# Altium PCB zigbee_board.PCBDOC (part 1 of 2)
Units mil, origin at the board's own origin, x right, y up, seen from the top; angles counter-clockwise.
Board outline 1555 x 795 mil, 2 copper layers (TOP, BOTTOM), stack 10.4 mil thick; 37 components, 38 nets, 180 pads, 75 vias.
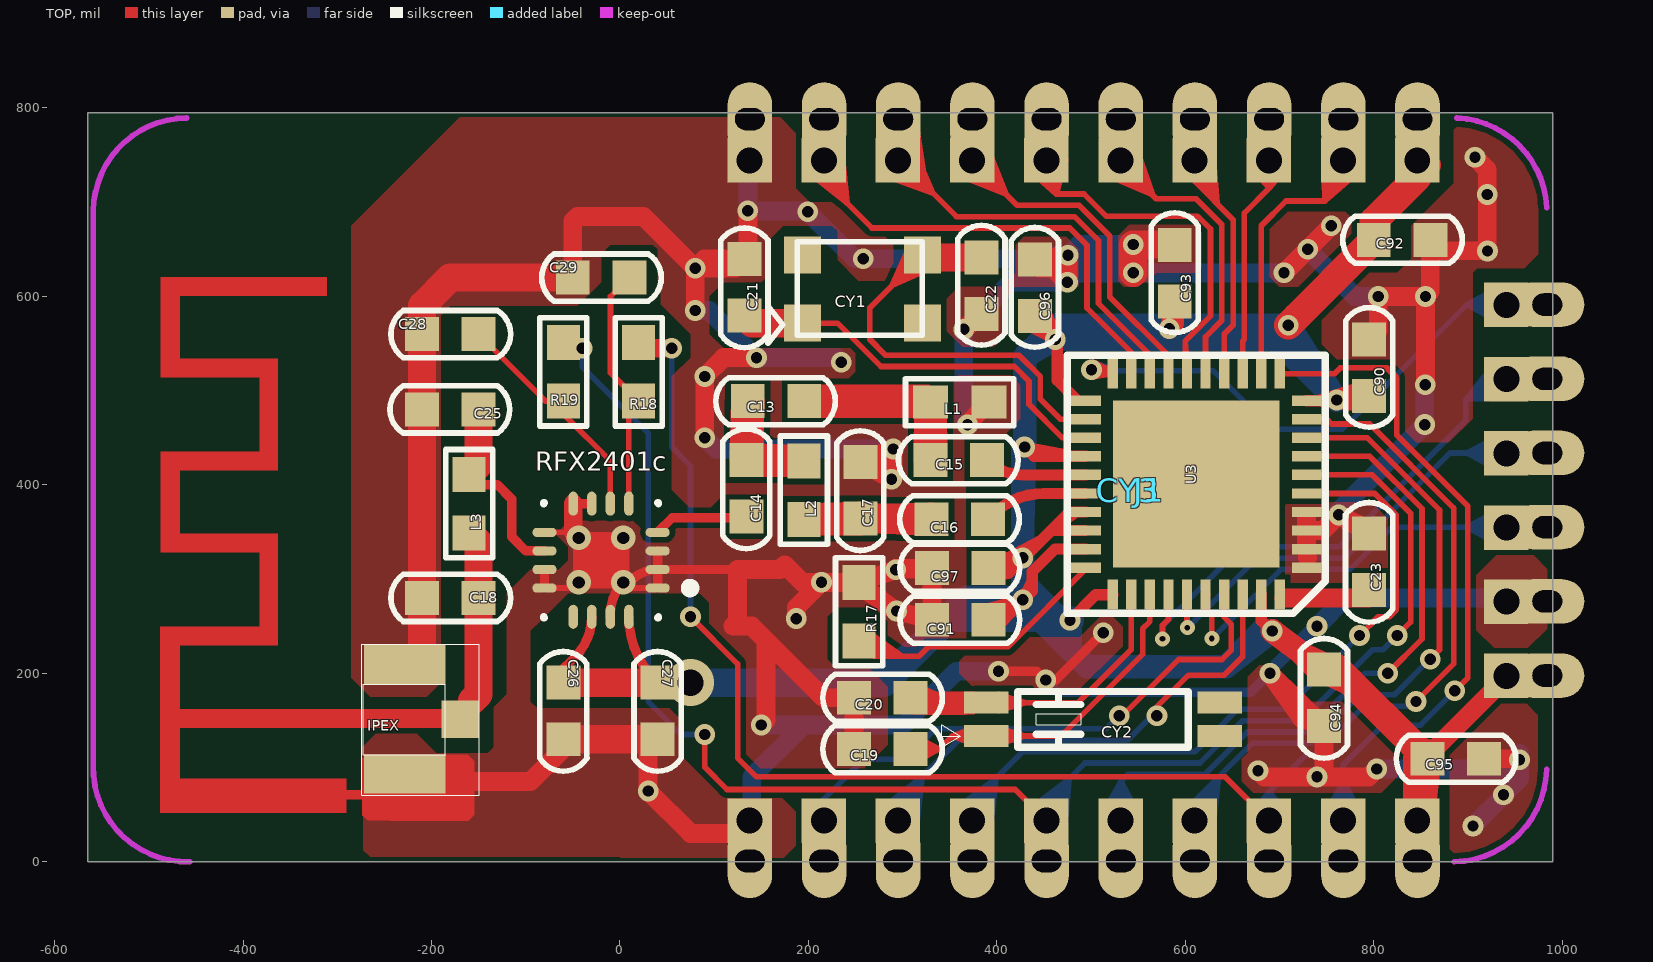
[diagram p0: TOP view]
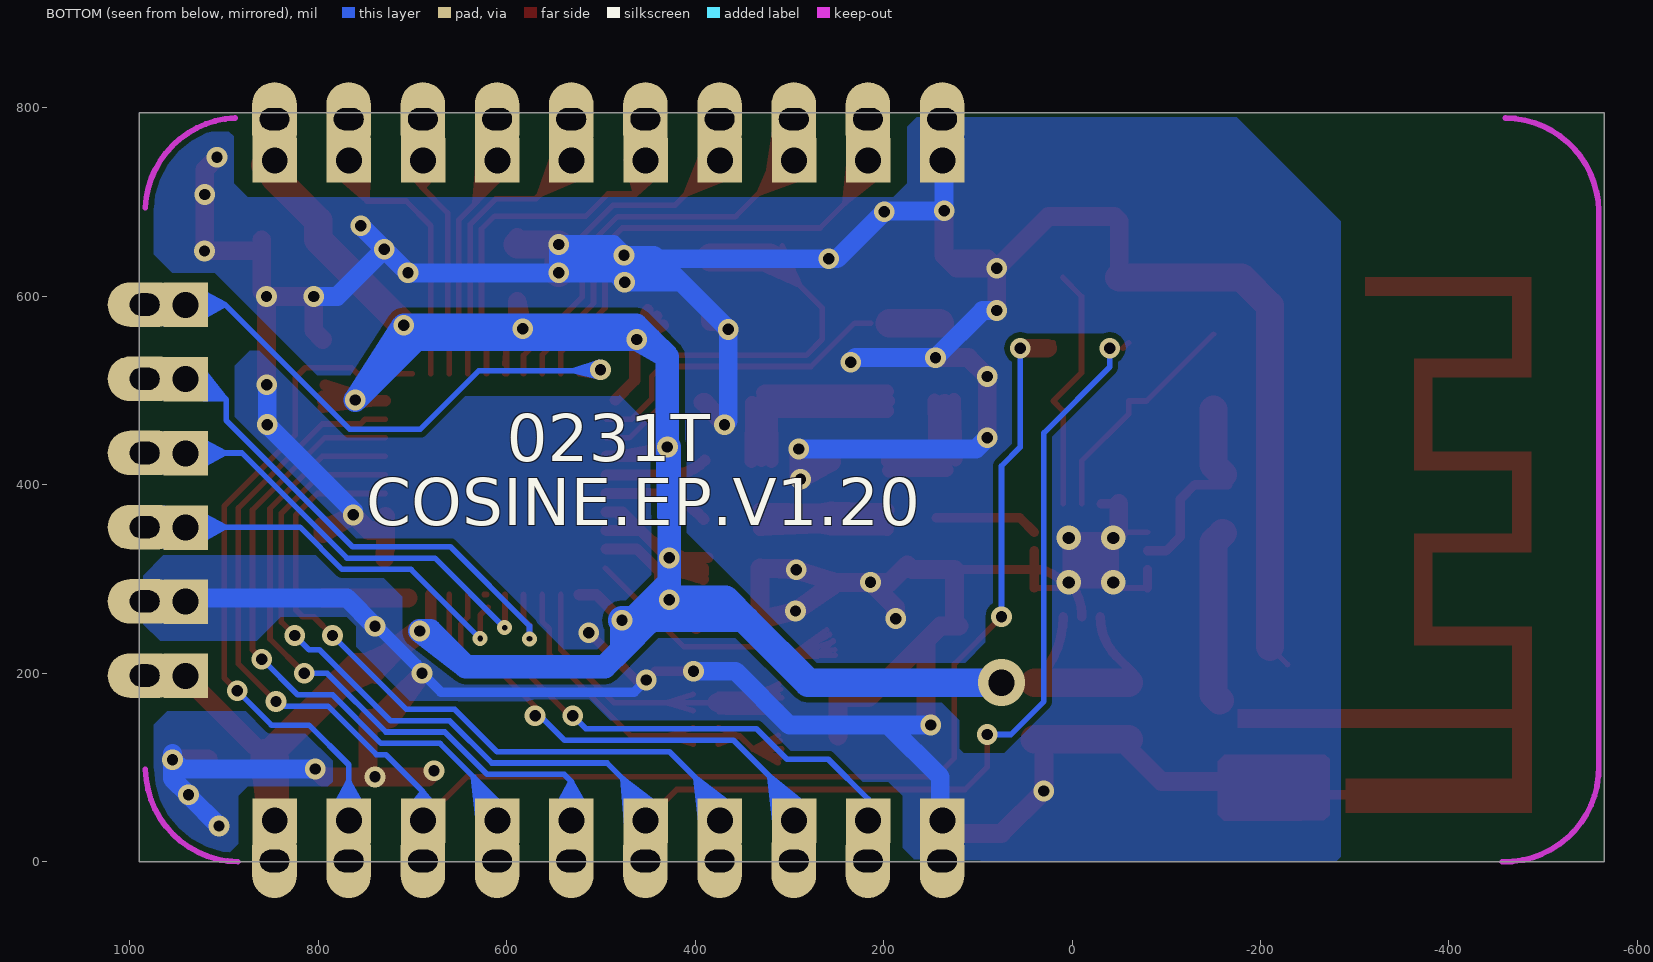
[diagram p1: BOTTOM view, seen from below]

## Layer stack, top to bottom
TOP: signal copper 1.2
Dielectric: dielectric 8, FR-4, Dk 4.5
BOTTOM: signal copper 1.2

## Board outline
-565,795 990,795 990,0 -565,0

## Design rules (kind name [scope] priority, off if disabled: settings)
Clearance "'Default' PADS rule_18" [All] p1: gap=6
Clearance "'Default' PADS rule_15" [IsVia vs IsVia] p2: gap=6
ComponentClearance "'Default' PADS rule_12" [All] p1: gap=6 collisioncheckmode=3 verticalgap=10
FlightTimeFalling "'Class' PADS rule_23" [InNetClass('Class1')] p1: maximum=10.00
FlightTimeFalling "'Default' PADS rule_6" [All] p2: maximum=10.00
FlightTimeRising "'Class' PADS rule_22" [InNetClass('Class1')] p1: maximum=10.00
FlightTimeRising "'Default' PADS rule_5" [All] p2: maximum=10.00
Length "'Class' PADS rule" [InNetClass('Class1')] p1: maxlimit=18503.27 minlimit=0
Length "'Default' PADS rule" [All] p2: maxlimit=50000 minlimit=0
MatchedLengths "'Class' PADS rule_24" [InNetClass('Class1')] p1: tolerance=200 checknetsindiffpair=TRUE checkdiffpairvsdiffpair=TRUE checkothers=TRUE
MatchedLengths "'Default' PADS rule_7" [InNetClass('All Nets')] p2: tolerance=200 checknetsindiffpair=TRUE checkdiffpairvsdiffpair=TRUE checkothers=TRUE
MaxMinImpedance "'Class' PADS rule_21" [InNetClass('Class1')] p1: minimum=50.00 maximum=150.0
MaxMinImpedance "'Default' PADS rule_4" [All] p2: minimum=50.00 maximum=150.0
ParallelSegment "'Class' PADS rule_20" [InNetClass('Class1')] p1: limit=1000 gap=200
ParallelSegment "'Class' PADS rule_19" [InNetClass('Class1')] p2: limit=1000 gap=200
ParallelSegment "'Default' PADS rule_3" [All] p3: limit=1000 gap=200
ParallelSegment "'Default' PADS rule_2" [All] p4: limit=1000 gap=200
PlaneClearance "'Default' PADS rule_14" [All] p1: clearance=6
PlaneConnect "Power Plane Connect Style - from global settings" [All] p1: planeconnectstyle=Relief reliefexpansion=20 reliefentries=2 reliefconductorwidth=10 reliefairgap=10
PolygonConnect [All] p1: connectstyle=Direct reliefconductorwidth=10 reliefentries=4 polygonreliefangle="90 Angle"
RoutingLayers "'Default' PADS rule_10" [All] p1: top layer_v5=TRUE bottom layer_v5=TRUE
RoutingPriority "'Default' PADS rule_9" [All] p1: routingpriority=0
RoutingTopology "'Default' PADS rule_8" [All] p1: topology=Shortest
RoutingVias "'Default' PADS rule_11" [All] p1: holewidth=12 width=22 viastyle="Through Hole" minholewidth=12 minwidth=22 maxholewidth=12 maxwidth=22
SMDToCorner "'Default' PADS rule_16" [All] p1: distance=60000
SMDToPlane "'Default' PADS rule_17" [All] p1: distance=60000
SolderMaskExpansion [All] p1: expansion=4
TestPointUsage [All] p1: valid=0 allowmultiple=FALSE
Testpoint [All] p1: side=15 testpointundercomponent=TRUE minsize=40 maxsize=100 preferedsize=60 minholesize=0 maxholesize=40 preferedholesize=32 testpointgrid=1 style=1023 order=0-112345678
Width "'Net' PADS rule_29" [InNet('NETC16_1')] p1: maxlimit=100 minlimit=6 preferedwidth=15
Width "'Net' PADS rule_28" [InNet('NETC13_1')] p2: maxlimit=100 minlimit=6 preferedwidth=15
Width "'Net' PADS rule_27" [InNet('GND')] p3: maxlimit=100 minlimit=6 preferedwidth=20
Width "'Net' PADS rule_26" [InNet('NETC13_2')] p4: maxlimit=100 minlimit=6 preferedwidth=15
Width "'Net' PADS rule_25" [InNet('NETC14_1')] p5: maxlimit=100 minlimit=6 preferedwidth=15
Width "'Net' PADS rule" [InNet('P02')] p6: maxlimit=100 minlimit=6 preferedwidth=12
Width "'Default' PADS rule_13" [All] p7: maxlimit=100 minlimit=6 preferedwidth=6
13 further rules are at their usual default settings.

## Components (designator, comment, footprint, x,y, rotation, side; value= is the part's Value field where it differs from the comment)
C13 "0603C" 0603C 165.7,488.79 r0 top
C14 "0603C" 0603C 134.21,396.19 r90 top
C15 "0603C" 0603C 359.7,426.21 r0 top
C16 "0603C" 0603C 360.93,363.47 r0 top
C17 "0603C" 0603C 255.22,394.34 r90 top
C18 "0603C" 0603C -180,280 r180 top
C19 "0603C" 0603C 278.35,119.55 r180 top
C20 "0603C" 0603C 278.35,174.02 r180 top
C21 "0603C" 0603C 132.2,609.61 r90 top
C22 "0603C" 0603C 383.77,611.37 r270 top
C23 "0603C" 0603C 795.17,318.16 r90 top
C25 "0603C" 0603C -180,480 r0 top
C26 "0603C" 0603C -60,160 r90 top
C27 "0603C" 0603C 40,160 r90 top
C28 "0603C" 0603C -180,560 r180 top
C29 "0603C" 0603C -20,620 r180 top
C90 "0603C" 0603C 795.34,524.14 r270 top
C91 "0603C" 0603C 361.37,256.83 r0 top
C92 "0603C" 0603C 830.21,660.1 r180 top
C93 "0603C" 0603C 588.95,624.71 r270 top
C94 "0603C" 0603C 747.36,173.8 r90 top
C95 "0603C" 0603C 887.07,109.26 r180 top
C96 "0603C" 0603C 440.53,609.15 r270 top
C97 "0603C" 0603C 361.37,311.83 r0 top
CY1 "CRY-3225" CRY-3225 181.62,551.81 r0 top
CY2 "XTAL1" XTAL1 388.86,133.41 r0 top
CY3 "COM25_DIP" COM25_DIP -0.1,0.35 r0 top
IPEX "ANT_DIP" ANT_DIP -211.66,150.72 r0 top
J1 "COM25X20" COM25X20 0.16,0.73 r0 top
L1 "0603" 0603 360.69,487.71 r180 top
L2 "0603" 0603 195.33,394.34 r90 top
L3 "0603" 0603 -160,380 r90 top
R17 "0603" 0603 253.85,265.29 r270 top
R18 "0603" 0603 20,520 r270 top
R19 "0603" 0603 -60,520 r270 top
RFX2401c "Comment" QFN50P300X300X60-16N -20,320 r180 top
U3 "CC2530" CC2530 611.79,400.69 r90 top

## Footprints (in the part's own frame and the unit in brackets; to place one, negate y for a bottom-side part, rotate by r counter-clockwise, add the part's x,y. Pads: shape width x height; smd on the part's side, far side on the other; paste and mask are expansions set on the pad)
0603 [mil]
  rect 37x35 smd: 1(-31,0) 2(31,0)
  silkscreen extent -58,-25 58,25
0603C [mil]
  rect 36x36 smd: 1(-30,0) 2(30,0)
  silkscreen extent -64,-25 63,25
ANT_DIP [mil]
  rect 39.4x39.4 smd: 1(42.2,0.4)
  rect 86.6x41.3 smd: 2(-16.9,58.6) 3(-16.9,-57.5)
  silkscreen extent -62,-80 62,80
CC2530 [mm]
  rect 0.28x0.8 smd: 1(-2.25,-2.975) 2(-1.75,-2.975) 3(-1.25,-2.975) 4(-0.75,-2.975) 5(-0.25,-2.975) 6(0.25,-2.975) 7(0.75,-2.975) 8(1.25,-2.975) 9(1.75,-2.975) 10(2.25,-2.975) 21(2.25,2.975) 22(1.75,2.975) 23(1.25,2.975) 24(0.75,2.975) 25(0.25,2.975) 26(-0.25,2.975) 27(-0.75,2.975) 28(-1.25,2.975) 29(-1.75,2.975) 30(-2.25,2.975)
  rect 0.8x0.28 smd: 11(2.975,-2.25) 12(2.975,-1.75) 13(2.975,-1.25) 14(2.975,-0.75) 15(2.975,-0.25) 16(2.975,0.25) 17(2.975,0.75) 18(2.975,1.25) 19(2.975,1.75) 20(2.975,2.25) 31(-2.975,2.25) 32(-2.975,1.75) 33(-2.975,1.25) 34(-2.975,0.75) 35(-2.975,0.25) 36(-2.975,-0.25) 37(-2.975,-0.75) 38(-2.975,-1.25) 39(-2.975,-1.75) 40(-2.975,-2.25)
  rect 4.5x4.5 smd: 41(0,0)
  silkscreen extent -3.48,-3.48 3.48,3.48
COM25_DIP [mm]
  rect 1.2x1.2 hole 0.7: 0(3.5,1.1) 1(5.5,1.1) 2(7.5,1.1) 3(9.5,1.1) 4(11.5,1.1) 5(13.5,1.1) 6(15.5,1.1) 7(17.5,1.1) 8(19.5,1.1) 9(21.5,1.1) 10(23.9,5) 11(23.9,7) 12(23.9,9) 13(23.9,11) 14(23.9,13) 15(23.9,15) 16(21.5,18.9) 17(19.5,18.9) 18(17.5,18.9) 19(15.5,18.9) 20(13.5,18.9) 21(11.5,18.9) 22(9.5,18.9) 23(7.5,18.9) 24(5.5,18.9) 25(3.5,18.9)
COM25X20 [mm]
  oval 1.2x2 hole 0.6 slot 0.8 at 0 deg: 0(3.5,0) 1(5.5,0) 2(7.5,0) 3(9.5,0) 4(11.5,0) 5(13.5,0) 6(15.5,0) 7(17.5,0) 8(19.5,0) 9(21.5,0) 16(21.5,20) 17(19.5,20) 18(17.5,20) 19(15.5,20) 20(13.5,20) 21(11.5,20) 22(9.5,20) 23(7.5,20) 24(5.5,20) 25(3.5,20)
  oval 2x1.2 hole 0.6 slot 0.8 at 0 deg: 10(25,5) 11(25,7) 12(25,9) 13(25,11) 14(25,13) 15(25,15)
CRY-3225 [mm]
  rect 1x1 smd: 1(0.308,0.504) 2(3.549,2.341) 3(3.549,0.504) 4(0.308,2.341)
  silkscreen extent -0.62,-0.04 3.54,2.7
QFN50P300X300X60-16N [mm] "QFN, 16-Leads, Body 3.1x3.1mm (max), Pitch 0.50mm, IPC Medium Density"
  oval 0.65x0.25 smd: 1(-1.525,0.75) 2(-1.525,0.25) 3(-1.525,-0.25) 4(-1.525,-0.75) 9(1.525,-0.75) 10(1.525,-0.25) 11(1.525,0.25) 12(1.525,0.75)
  oval 0.25x0.65 smd: 5(-0.75,-1.525) 6(-0.25,-1.525) 7(0.25,-1.525) 8(0.75,-1.525) 13(0.75,1.525) 14(0.25,1.525) 15(-0.25,1.525) 16(-0.75,1.525)
  silkscreen extent -2.53,-1.55 1.55,1.55, body extent -1.55,-1.55 1.55,1.55, height 0.6
XTAL1 [mm]
  rect 1.2x0.6 smd: 1(0,0) 2(0,0.9) 3(6.3,0) 4(6.3,0.9)
  silkscreen extent -1.2,-0.3 5.45,1.2

## Via types
v1: diameter 22, hole 12, TOP to BOTTOM, 67 vias
v2: diameter 25.98, hole 12.99, TOP to BOTTOM, tented top, 4 vias
v3: diameter 16, hole 6, TOP to BOTTOM, 3 vias
v4: diameter 50, hole 28, TOP to BOTTOM, 1 vias

## Nets (pads, with @x,y where several pads share a name; then routed paths per layer and width w, separated by ;. In a path a pad name is that pad's centre, name@x,y a point inside that pad or via, vN(x,y) a via of type N, cw(c..) or ccw(c..) an arc to the next point about the centre after c; other vN are vias at no path point)
C18_1: C18.1 IPEX.1 L3.1 | length 184.9
  TOP w30: L3.1@-160,349 -150,339 -150,177.76 -156.75,171.01
C25_1: C25.2 L3.2 RFX2401c.10 | length 210.6
  TOP w10: L3.2@-165,400 -130,400 -115,385 -115,345 -99.84,329.84 RFX2401c.10@-80.04,329.84
  TOP w30: L3.2@-160,411 -150,421 C25.2@-150,480
GND: C17.2 C18.2 C19.2 C20.2 C21.2 C22.2 C23.2 C25.1 C26.1 C27.1 C28.2 C29.2 C90.1 C91.1 C92.1 C93.1 C94.1 C95.1 C96.1 C97.1 CY3.0 CY3.11 CY3.25 IPEX.2 IPEX.3 J1.0 J1.11 J1.25 L1.1 R17.1 RFX2401c.1 RFX2401c.2 RFX2401c.3 RFX2401c.7 RFX2401c.8 RFX2401c.9 RFX2401c.11 RFX2401c.12 RFX2401c.15 U3.1 U3.2 U3.3 U3.4 | length 7842.7
  TOP w6: IPEX.2@-228.56,209.32 IPEX.2@-210,227.88 ; RFX2401c.12@-80.04,290.47 v2@-49.53,290.47 ; RFX2401c.9@-80.04,349.53 v2@-49.53,349.53 ; v2@3.62,290.47 RFX2401c.1@40.04,290.47
  TOP w10: RFX2401c.12@-80.04,290.47 RFX2401c.11@-80.04,310.16 ; RFX2401c.8@-49.53,380.04 RFX2401c.7@-31.08,380.04 ; RFX2401c.15@-10.16,259.96 -10.16,263.11 cw(c36.89,263.11) v2(3.62,296.38) ; v2@6.57,293.43 11.48,298.33 cw(c40.04,269.76) RFX2401c.2@40.04,310.16 ; RFX2401c.1@40.04,290.47 RFX2401c.2@40.04,310.16 ; RFX2401c.3@40.04,329.84 RFX2401c.2@40.04,310.16 ; 124.84,310.16 RFX2401c.2@40.04,310.16 ; v1(401.82,202.21) 442.55,202.21 v1(451.96,192.8) 462.66,192.8 v1(512.94,243.08)
  TOP w20: IPEX.3@-210,85 -95,85 C26.1@-50,130 ; C29.2@-50,620 -50,680 -45,685 25,685 v1(80,630) ; v2@-49.53,349.53 RFX2401c.8@-49.53,380.04 ; C27.1@30,130 v1(30,75) 75,30 CY3.0@135,30 ; v1(80,585) v1(80,630) ; v1(90,450) v1(90,515) 110,535 v1(145,535) ; v1(135.84,690.8) 135.84,643.25 C21.2@132.2,639.61 ; v1(150,145) 155,150 155,235 ; v1(187.34,258.01) 187.34,269.82 v1(213.98,296.46) ; C19.2@248.35,133.35 C20.2@248.35,174.02 215.98,174.02 155,235 ; R17.1@253.85,292.85 v1(293.51,266.07) ; R17.1@253.85,296.29 v1(213.98,296.46) ; R17.1@253.85,297.29 v1(292.76,309.74) ; 273.78,431.67 278.42,431.67 ; v1@292.76,311.48 C97.1@331.37,311.83 ; C97.1@331.37,311.48 v1(292.76,309.74) ; L1.1@390.69,487.71 v1(368.93,463.89) 389.74,487.71 L1.1@391.69,487.71 ; C96.1@445,630 460,630 v1(475,615) ; v1@475.66,615.66 v1(475.66,643.63) ; C93.1@588.95,654.71 C93.1@588.95,662.71 ; v1(677.33,96.57) 683.91,90 v1(740,90) ; v1(705,625) v1(730,650) v1(755,675) ; U3.4@728.91,366.66 U3.3@728.91,351.48 ; 730,322.24 U3.2@728.91,331.79 U3.3@728.91,351.48 ; C90.1@795.34,554.14 805,563.81 v1(805,600) v1(855,600) ; v1(803.31,98.47) 794.84,90 v1(740,90) ; v1(854.94,506.26) 855,506.32 v1(855,600) ; C92.1@860.21,660.1 C92.1@860.21,645 ; v1(907.64,747.59) 920.65,734.58 v1(920.65,708.17) v1@920.65,648.55 ; C95.1@917.07,109.26 v1@953.92,109.26 ; v1(920.9,648.3) v1@920.65,648.55 ; v1(80,630) 89.61,639.61 C21.2@132.2,639.61 ; v1(80,630) 122.59,630 C21.2@132.2,639.61 ; 155,235 140,250 120,250 125,255 125,310 170,310 175,315 193.54,296.46 v1(213.98,296.46) ; v1(292.76,309.74) C97.1@331.37,311.83 ; v1(293.51,266.07) 253.85,295.29 v1(293.51,266.07) ; v1(293.51,266.07) C91.1@331.37,256.83 C97.1@331.37,311.83 ; v1(475.66,643.63) 471.18,639.15 C96.1@440.53,639.15 v1(475.66,643.63) ; 723.57,151.8 747.36,151.8 747.36,97.36 v1(740,90) ; 723.57,151.8 v1(690,200) C94.1@747.36,143.8 ; 723.57,151.8 C94.1@747.36,143.8 ; 723.57,151.8 C94.1@747.36,143.8 ; U3.3@728.91,351.48 746.26,351.48 v1(762.88,368.1) ; v1(762.88,368.1) 787.17,356.16 795.17,356.16 C23.2@795.17,348.16 v1(762.88,368.1) ; v1(855,600) 860.21,605.21 C92.1@860.21,645 ; C92.1@860.21,645 863.76,648.55 v1@920.65,648.55 ; C17.2@255.22,424.34 v1(288.2,405.91) 290.09,407.8 v1(290.09,438.11) C17.2@255.22,424.34 ; v1(365,565) 375.77,573.37 383.77,573.37 C22.2@383.77,581.37 v1(365,565)
  TOP w30: IPEX.2@-210,227.88 -210,590 -180,620 C29.2@-50,620 ; C26.1@-60,130 -50,130 30,130 C27.1@40,130 ; v1(545,625) v1(545,655) C93.1@588.66,655
  BOTTOM w10: v1(451.96,192.8) 464.76,180 670,180 v1(740,250) ; 695,210 v1@735,250
  BOTTOM w20: v1(80,585) 95,585 v1(145,535) 230,535 v1(235,530) ; v1(90,450) 101.89,438.11 v1(290.09,438.11) ; CY3.25@135.84,742.59 v1(135.84,690.8) v1@198.55,690.8 ; CY3.0@140,35 140,43.66 140,90 195,145 ; v1(150,145) 195,145 ; v1(199.42,689.93) 249.39,639.96 v1(258.2,639.96) 439.96,639.96 ; v1(368.93,463.89) 365,467.82 v1(365,565) 415,615 ; v1(401.82,202.21) 357.21,202.21 300,145 195,145 ; v1(740,250) 770,280 940.84,280 CY3.11@955,280 ; v1(755,675) v1(730,650) ; v1(762.88,368.1) 762.88,372.46 v1(854.35,463.93) 854.35,505.67 v1(854.94,506.26) ; v1(803.31,98.47) 945.23,98.47 v1@954.97,108.21 ; v1(805,600) 780,600 v1(730,650) ; v1(905.45,37.82) 937.89,70.26 v1(937.89,71.08) 955,88.19 955,108.25 v1@955,115 ; 415,615 432.06,632.06 ; 415,615 v1(475,615) v1@475.66,615.66 ; 432.06,632.06 439.96,639.96 ; 432.06,632.06 475,632.06 475.66,632.06 ; 439.96,639.96 443.63,643.63 v1(475.66,643.63) ; 439.96,639.96 471.99,639.96 v1(475.66,643.63) ; v1@475.66,615.66 475.66,632.06 ; v1@475.66,615.66 485,625 v1(545,625) ; 475.66,632.06 v1(475.66,643.63) ; 475.66,632.06 537.94,632.06 v1(545,625) ; v1(475.66,643.63) 487.03,655 v1(545,655) ; v1(475.66,643.63) 533.63,643.63 v1(545,655) ; v1(545,625) v1(705,625) v1(730,650) ; v1(545,625) v1(545,655)
  other v1: 954.93,108.25
  other v2: -43.62,296.38 -43.62,343.62 3.62,343.62
NETC13_1: C13.1 C14.2 L2.2 | length 1487.2
  TOP w15: C13.1@125.22,488.16 C14.2@134.21,426.19 ; C13.1@125.26,489.92 C14.2@123.75,427.07 ; C13.1@125.47,486.41 C14.2@144.68,427.07 ; C14.2@133.25,415.73 L2.2@194.38,415.38 ; C14.2@133.54,436.67 L2.2@194.65,435.31 ; C14.2@134.97,415.72 L2.2@195.33,425.34 ; C14.2@135.12,415.73 L2.2@195.33,426.19 ; C14.2@135.12,436.65 L2.2@195.33,426.19 ; C14.2@135.26,436.64 L2.2@195.33,425.34 ; C14.2@136.67,415.98 L2.2@194.65,435.31 ; C14.2@136.95,436.33 L2.2@194.38,415.38 ; C13.1@145.81,485.94 C14.2@123.75,427.07 ; C13.1@146.14,487.67 C14.2@134.21,426.19 ; C13.1@146.18,489.42 C14.2@144.68,427.07 ; C14.2@123.75,427.07 C13.1@134.21,488.79 ; C14.2@123.75,427.07 C13.1@135.7,488.79 ; C14.2@134.21,426.19 L2.2@195.33,426.19 ; C14.2@134.21,426.19 C13.1@134.21,488.79 ; C14.2@134.21,426.19 L2.2@194.38,415.38 ; C14.2@134.21,426.19 L2.2@194.65,435.31 ; C14.2@134.21,426.19 L2.2@195.33,425.34 ; C14.2@134.21,426.19 C13.1@135.7,488.79 ; C13.1@134.21,488.79 C13.1@135.7,488.79 ; C13.1@134.21,488.79 C14.2@144.68,427.07 ; C13.1@135.7,488.79 C14.2@144.68,427.07 ; L2.2@195.33,425.34 L2.2@195.33,426.19
NETC13_2: C13.2 C15.1 L1.2 | length 1259.1
  TOP w15: C13.2@195.7,488.79 313.56,488.79 L1.2@321.51,496.75 ; C15.1@319.23,425.4 L1.2@319.72,486.9 ; C15.1@319.24,427.11 L1.2@329.69,487.71 ; C15.1@319.52,428.79 L1.2@339.66,486.9 ; L1.2@326.5,499.26 196.57,499.26 258.7,488.79 196.57,478.33 327.54,478.33 L1.2@328.18,478.98 ; L1.2@327.72,477.76 266.17,488.79 ; L1.2@328.06,497.7 266.17,488.79 ; L1.2@328.69,487.71 266.17,488.79 ; L1.2@329.69,488.79 L1.2@329.69,487.71 ; C15.1@339.88,428.8 L1.2@319.72,486.9 ; C15.1@340.17,425.4 L1.2@339.66,486.9 ; C15.1@340.16,427.11 L1.2@329.69,487.71 ; L1.2@319.72,486.9 C15.1@329.7,426.21 ; C15.1@329.7,426.21 L1.2@329.69,487.71 ; C15.1@329.7,426.21 L1.2@339.66,486.9
NETC14_1: C14.1 RFX2401c.4 | length 110.6
  TOP w10: RFX2401c.4@40.04,349.53 55.51,365 C14.1@144.21,365
NETC15_2: C15.2 U3.25 | length 150.7
  TOP w12: C15.2@389.7,426.21 389.92,425.99 ccw(c427.24,463.3) 427.24,410.53 U3.25@494.66,410.53 ; 442.91,410.53 U3.25@484.43,410.53
NETC16_1: C16.1 C17.1 L2.1 | length 1680.9
  TOP w15: C17.1@252.4,374.45 L2.1@196.33,353.39 ; C17.1@252.74,354.13 L2.1@196,373.31 ; C17.1@254.12,374.78 L2.1@195.33,363.34 ; C17.1@254.3,353.88 L2.1@195.33,364.34 ; C17.1@254.3,374.8 L2.1@195.33,364.34 ; C17.1@254.47,353.86 L2.1@195.33,363.34 ; C17.1@255.87,374.82 L2.1@196,373.31 ; C17.1@255.95,353.86 C16.1@318.23,363.47 ; C17.1@256.22,353.89 L2.1@196.33,353.39 ; C17.1@256.23,374.79 C16.1@318.23,363.47 ; C16.1@328.56,353.24 C17.1@268.1,372.62 ; C16.1@328.79,373.75 C17.1@268.04,355.73 ; C16.1@329.94,353.02 C17.1@267.93,364.16 ; C16.1@330.05,353.01 267.93,363.47 C16.1@330.05,373.94 ; C16.1@330.17,373.94 C17.1@267.93,364.16 ; C16.1@331.34,352.98 C17.1@268.04,355.73 ; C16.1@331.58,373.95 C17.1@268.1,372.62 ; L2.1@195.33,363.34 L2.1@195.33,364.34 ; L2.1@195.33,363.34 C17.1@255.22,364.34 ; L2.1@195.33,364.34 C17.1@255.22,364.34 ; L2.1@196,373.31 C17.1@255.22,364.34 ; L2.1@196.33,353.39 C17.1@255.22,364.34 ; C17.1@255.22,364.34 255.22,363.47 C16.1@330.93,363.47 ; C17.1@255.22,364.34 C16.1@318.23,363.47 ; C17.1@267.93,364.16 C16.1@330.93,363.47 ; C17.1@268.04,355.73 C16.1@330.93,363.47 ; C17.1@268.1,372.62 C16.1@330.93,363.47
NETC16_2: C16.2 U3.26 | length 146.4
  TOP w12: C16.2@390.93,363.47 396.04,368.59 cw(c449.78,314.85) 449.78,390.85 ; U3.26@484.43,390.85 449.78,390.85 ; U3.26@494.66,390.85 449.78,390.85
NETC19_1: C19.1 CY2.1 U3.33 | length 657.6
  TOP w6: C19.1@308.35,119.55 338.87,119.55 ; C19.1@309.67,110.65 338.87,119.55 ; C19.1@309.67,128.46 338.87,119.55 ; C19.1@312.03,105.01 338.87,119.55 ; C19.1@312.03,134.09 338.87,119.55 ; CY2.1@375.46,124.74 352.72,133.41 ; CY2.1@375.46,142.07 352.72,133.41 ; CY2.1@377.05,133.41 352.72,133.41 ; CY2.1@400.67,133.41 430.49,133.41 ; CY2.1@401.98,124.69 430.49,133.41 ; CY2.1@401.98,142.12 430.49,133.41 ; U3.33@562.58,273.33 562.58,255.09 ; U3.33@562.58,283.56 562.58,255.09 ; 338.87,119.55 352.72,133.41 ; 352.72,133.41 468.13,133.41 554.8,220.08 554.8,247.31 562.58,255.09
NETC20_1: C20.1 CY2.2 U3.32 | length 936.4
  TOP w6: C20.1@308.35,174.02 C20.1@320,174.02 ; C20.1@309.51,182.94 343.2,174.02 ; C20.1@311.57,188.67 343.2,174.02 ; C20.1@311.87,177.55 C20.1@323.53,177.55 ; C20.1@320.92,168.12 C20.1@321.3,168.12 ; C20.1@321.22,168.2 C20.1@321.3,168.12 ; 326.36,163.05 C20.1@324.32,165.1 ; 337.3,168.12 C20.1@321.3,168.12 ; CY2.2@374.94,159.37 311.57,159.37 343.2,174.02 ; CY2.2@375.7,160.13 348.38,168.84 ; CY2.2@400.67,168.84 430.49,168.84 ; CY2.2@401.98,160.13 430.49,168.84 ; CY2.2@401.98,177.56 430.49,168.84 ; U3.32@542.89,273.33 542.89,253.81 ; U3.32@542.89,283.56 542.89,253.81 ; C20.1@320,174.02 325.18,168.84 348.38,168.84 ; C20.1@320,174.02 343.2,174.02 ; C20.1@320,174.02 C20.1@323.53,177.55 ; C20.1@321.3,168.12 C20.1@324.32,165.1 ; C20.1@323.53,177.55 375.7,177.55 348.38,168.84 ; C20.1@324.32,165.1 309.51,165.1 343.2,174.02 ; C20.1@324.32,165.1 361.25,165.1 365,168.84 ; 343.2,174.02 348.38,168.84 ; 348.38,168.84 365,168.84 ; 365,168.84 486.59,168.84 542.8,225.05 542.8,253.72 542.89,253.81
  TOP w15: 326.36,163.05 CY2.2@366.56,163.05
  TOP w20: 348.38,168.84 CY2.2@377.05,168.84
NETC21_1: C21.1 CY1.1 U3.23 | length 433.1
  TOP w6: C21.1@132.2,571.64 C21.1@132.2,579.61 C21.1@140.17,571.64 ; 213.68,571.66 231.04,571.66 277.14,525.57 418.71,525.57 434.27,510 434.27,485.55 469.91,449.9 ; U3.23@484.43,449.9 469.91,449.9 ; U3.23@494.66,449.9 469.91,449.9
  TOP w30: C21.1@140.17,571.64 CY1.1@193.76,571.64
NETC22_1: C22.1 CY1.2 U3.22 | length 748.5
  TOP w6: CY1.2@307.61,653.44 288.94,611.57 ; CY1.2@312.97,650.61 288.94,611.57 ; CY1.2@317.88,647.12 288.94,611.57 ; CY1.2@321.36,641.37 CY1.2@321.36,643.98 265.17,587.79 265.17,554.51 282.11,537.57 423.68,537.57 446.27,514.98 446.27,490.88 467.56,469.59 ; CY1.2@324.5,640.51 288.94,611.57 ; CY1.2@327.98,635.6 288.94,611.57 ; CY1.2@330.81,630.23 288.94,611.57 ; U3.22@484.43,469.59 467.56,469.59 ; U3.22@494.66,469.59 467.56,469.59
  TOP w30: CY1.2@321.36,641.37 C22.1@383.77,641.37
NETC23_1: C23.1 U3.40 | length 90.3
  TOP w20: U3.40@704.73,280 C23.1@795,280
NETR17_2: R17.2 U3.30 | length 529.7
  TOP w6: R17.2@251.4,219 299.94,218.04 ; R17.2@251.89,225.02 299.94,218.04 ; R17.2@253.85,233.29 299.94,218.04 ; R17.2@253.85,234.29 270.1,218.04 317.32,218.04 327.29,228.01 411.99,228.01 U3.30@495.38,311.39 ; R17.2@257.21,241.09 299.94,218.04 ; R17.2@260.41,246.22 299.94,218.04
P00: CY3.24 J1.24 U3.19 | length 1682.5
  TOP w6: CY3.24@196.49,749.68 J1.24@216.69,786.07 ; CY3.24@196.71,767.28 CY3.24@216.69,730.76 ; CY3.24@197.34,752.23 J1.24@216.69,772.38 ; CY3.24@200.65,731.17 241.27,698.9 ; CY3.24@202.05,747.1 J1.24@216.69,786.07 ; J1.24@202.3,769.82 CY3.24@216.69,730.76 ; CY3.24@202.36,748.4 J1.24@216.69,772.38 ; CY3.24@204.71,735.7 241.27,698.9 ; CY3.24@207.86,745.39 J1.24@216.69,786.07 ; CY3.24@207.93,745.85 J1.24@216.69,772.38 ; J1.24@208.12,771.49 CY3.24@216.69,730.76 ; CY3.24@209.23,739.7 241.27,698.9 ; J1.24@216.69,788.13 216.69,744.44 216.69,723.48 267.49,672.68 477.52,672.68 495.84,654.36 495.84,587.68 542.89,540.63 ; CY3.24@224.32,747.93 241.27,698.9 ; CY3.24@224.96,745.69 J1.24@216.69,772.38 ; CY3.24@225.01,745.28 J1.24@216.69,786.07 ; J1.24@225.27,771.49 CY3.24@216.69,730.76 ; CY3.24@230.13,749.57 241.27,698.9 ; CY3.24@230.58,748.14 J1.24@216.69,772.38 ; CY3.24@230.84,746.92 J1.24@216.69,786.07 ; J1.24@231.09,769.82 CY3.24@216.69,730.76 ; CY3.24@235.67,751.87 J1.24@216.69,772.38 ; CY3.24@236.14,750.52 241.27,698.9 ; CY3.24@236.44,749.43 J1.24@216.69,786.07 ; CY3.24@236.67,767.28 CY3.24@216.69,730.76 ; U3.19@542.89,517.82 542.89,540.63 ; U3.19@542.89,528.05 542.89,540.63 ; CY3.24@216.43,744.44 J1.24@216.69,786.07 ; CY3.24@216.43,744.44 J1.24@216.69,772.38 ; CY3.24@216.43,744.44 241.27,698.9 ; CY3.24@216.69,730.76 J1.24@216.69,772.38
P01: CY3.23 J1.23 U3.18 | length 4483.9
  TOP w6: CY3.23@275.23,749.68 J1.23@295.43,786.07 ; CY3.23@276.08,752.23 J1.23@295.43,772.38 ; CY3.23@277.88,755.67 J1.23@303.31,775.9 ; CY3.23@279.07,759.84 324.87,717.04 ; CY3.23@279.21,757.5 J1.23@309.06,777.7 ; CY3.23@280.56,759 J1.23@314.99,778.94 ; CY3.23@280.79,747.1 J1.23@295.43,786.07 ; CY3.23@281.1,748.4 J1.23@295.43,772.38 ; CY3.23@282.2,751.19 J1.23@303.31,775.9 ; CY3.23@283.1,752.7 J1.23@309.06,777.7 ; CY3.23@283.41,764.06 324.87,717.04 ; CY3.23@284.05,753.93 J1.23@314.99,778.94 ; CY3.23@284.41,726.85 332.24,709.67 ; CY3.23@286.6,745.39 J1.23@295.43,786.07 ; CY3.23@286.67,745.85 J1.23@295.43,772.38 ; CY3.23@286.81,732.45 332.24,709.67 ; CY3.23@287.19,747.69 J1.23@303.31,775.9 ; CY3.23@287.67,748.69 J1.23@309.06,777.7 ; CY3.23@288.12,767.82 324.87,717.04 ; CY3.23@288.2,749.52 J1.23@314.99,778.94 ; CY3.23@289.83,737.68 332.24,709.67 ; J1.23@295.43,788.13 295.43,746.48 296.32,745.59 357.22,684.69 482.49,684.69 507.97,659.21 507.97,592.6 562.58,537.99 ; CY3.23@301.58,750.21 332.24,709.67 ; CY3.23@303.07,740.98 J1.23@314.99,778.94 ; CY3.23@303.47,742.1 J1.23@309.06,777.7 ; CY3.23@303.7,745.69 J1.23@295.43,772.38 ; CY3.23@303.73,743.41 J1.23@303.31,775.9 ; CY3.23@303.75,745.28 J1.23@295.43,786.07 ; CY3.23@306.61,753.56 332.24,709.67 ; CY3.23@308.97,739.62 J1.23@314.99,778.94 ; CY3.23@309.32,748.14 J1.23@295.43,772.38 ; CY3.23@309.53,741.66 J1.23@309.06,777.7 ; CY3.23@309.58,746.92 J1.23@295.43,786.07 ; CY3.23@309.79,744.06 J1.23@303.31,775.9 ; CY3.23@312.04,756.31 332.24,709.67 ; CY3.23@314.41,751.87 J1.23@295.43,772.38 ; CY3.23@315.11,739.16 J1.23@314.99,778.94 ; CY3.23@315.18,749.43 J1.23@295.43,786.07 ; CY3.23@315.68,742.28 J1.23@309.06,777.7 ; CY3.23@315.74,745.88 J1.23@303.31,775.9 ; U3.18@562.58,517.82 562.58,537.99 ; U3.18@562.58,528.05 562.58,537.99 ; CY3.23@285.52,726.22 324.87,717.04 ; CY3.23@285.52,726.22 324.87,717.04 ; CY3.23@285.52,726.22 324.87,717.04 ; CY3.23@285.52,726.22 324.87,717.04 ; CY3.23@285.52,726.22 324.87,717.04 ; CY3.23@285.52,726.22 324.87,717.04 ; CY3.23@285.52,726.22 324.87,717.04 ; CY3.23@287.37,732.08 324.87,717.04 ; CY3.23@287.37,732.08 324.87,717.04 ; CY3.23@287.37,732.08 324.87,717.04 ; CY3.23@287.37,732.08 324.87,717.04 ; CY3.23@287.37,732.08 324.87,717.04 ; CY3.23@287.37,732.08 324.87,717.04 ; CY3.23@287.37,732.08 324.87,717.04 ; CY3.23@290.04,737.52 324.87,717.04 ; CY3.23@290.04,737.52 324.87,717.04 ; CY3.23@290.04,737.52 324.87,717.04 ; CY3.23@290.04,737.52 324.87,717.04 ; CY3.23@290.04,737.52 324.87,717.04 ; CY3.23@290.04,737.52 324.87,717.04 ; CY3.23@290.04,737.52 324.87,717.04 ; CY3.23@295.17,744.44 324.87,717.04 ; CY3.23@295.17,744.44 324.87,717.04 ; CY3.23@295.17,744.44 324.87,717.04 ; CY3.23@295.17,744.44 324.87,717.04 ; CY3.23@295.17,744.44 J1.23@303.31,775.9 ; CY3.23@295.17,744.44 J1.23@295.43,786.07 ; CY3.23@295.17,744.44 324.87,717.04 ; CY3.23@295.17,744.44 J1.23@295.43,772.38 ; CY3.23@295.17,744.44 324.87,717.04 ; CY3.23@295.17,744.44 J1.23@309.06,777.7 ; CY3.23@295.17,744.44 324.87,717.04 ; CY3.23@295.17,744.44 J1.23@314.99,778.94 ; CY3.23@295.17,744.44 332.24,709.67 ; J1.23@295.43,772.38 324.87,717.04 ; CY3.23@301.66,750.12 324.87,717.04 ; CY3.23@301.66,750.12 324.87,717.04 ; CY3.23@301.66,750.12 324.87,717.04 ; CY3.23@301.66,750.12 324.87,717.04 ; CY3.23@301.66,750.12 324.87,717.04 ; CY3.23@301.66,750.12 324.87,717.04 ; CY3.23@301.66,750.12 324.87,717.04 ; J1.23@303.31,775.9 324.87,717.04 ; CY3.23@306.87,753.22 324.87,717.04 ; CY3.23@306.87,753.22 324.87,717.04 ; CY3.23@306.87,753.22 324.87,717.04 ; CY3.23@306.87,753.22 324.87,717.04 ; CY3.23@306.87,753.22 324.87,717.04 ; CY3.23@306.87,753.22 324.87,717.04 ; CY3.23@306.87,753.22 324.87,717.04 ; J1.23@309.06,777.7 324.87,717.04 ; CY3.23@312.56,755.53 324.87,717.04 ; CY3.23@312.56,755.53 324.87,717.04 ; CY3.23@312.56,755.53 324.87,717.04 ; CY3.23@312.56,755.53 324.87,717.04 ; CY3.23@312.56,755.53 324.87,717.04 ; CY3.23@312.56,755.53 324.87,717.04 ; CY3.23@312.56,755.53 324.87,717.04 ; J1.23@314.99,778.94 324.87,717.04
P02: CY3.22 J1.22 U3.17 | length 669.1
  TOP w6: CY3.22@362.55,727.23 410.26,708.09 ; CY3.22@365.15,732.74 410.26,708.09 ; CY3.22@368.35,737.86 410.26,708.09 ; CY3.22@373.91,744.44 421.66,696.69 487.46,696.69 519.97,664.18 519.97,599.51 582.26,537.22 ; CY3.22@380.5,750.01 410.26,708.09 ; CY3.22@385.62,753.21 410.26,708.09 ; CY3.22@391.12,755.8 410.26,708.09 ; U3.17@582.26,517.82 582.26,537.22 ; U3.17@582.26,528.05 582.26,537.22
P03: CY3.21 J1.21 U3.16 | length 1492.3
  TOP w6: CY3.21@432.71,749.68 J1.21@452.91,786.07 ; CY3.21@432.93,767.28 CY3.21@452.91,730.76 ; CY3.21@433.56,752.23 J1.21@452.91,772.38 ; CY3.21@435.22,733.42 463.06,708.7 ; CY3.21@438.27,747.1 J1.21@452.91,786.07 ; J1.21@438.52,769.82 CY3.21@452.91,730.76 ; CY3.21@438.58,748.4 J1.21@452.91,772.38 ; CY3.21@439.69,737.68 463.06,708.7 ; CY3.21@444.08,745.39 J1.21@452.91,786.07 ; CY3.21@444.15,745.85 J1.21@452.91,772.38 ; J1.21@444.34,771.49 CY3.21@452.91,730.76 ; CY3.21@444.71,741.09 463.06,708.7 ; J1.21@452.91,788.13 452.91,744.44 452.91,718.84 463.06,708.7 ; CY3.21@461.15,745.88 463.06,708.7 ; CY3.21@461.18,745.69 J1.21@452.91,772.38 ; CY3.21@461.23,745.28 J1.21@452.91,786.07 ; J1.21@461.49,771.49 CY3.21@452.91,730.76 ; CY3.21@466.8,748.14 J1.21@452.91,772.38 ; CY3.21@467.06,746.92 J1.21@452.91,786.07 ; CY3.21@467.22,745.69 463.06,708.7 ; J1.21@467.31,769.82 CY3.21@452.91,730.76 ; CY3.21@471.89,751.87 J1.21@452.91,772.38 ; CY3.21@472.66,749.43 J1.21@452.91,786.07 ; CY3.21@472.89,767.28 CY3.21@452.91,730.76 ; CY3.21@473.27,744.5 463.06,708.7 ; 599.91,551.6 U3.16@601.95,528.05 ; U3.16@601.95,517.82 599.91,517.82 599.91,552.34 626.89,579.31 626.89,671.5 613.13,685.26 516.08,685.26 492.63,708.7 463.06,708.7 ; CY3.21@452.65,744.44 463.06,708.7 ; CY3.21@452.65,744.44 J1.21@452.91,786.07 ; CY3.21@452.65,744.44 J1.21@452.91,772.38 ; CY3.21@452.91,730.76 J1.21@452.91,772.38
P04: CY3.20 J1.20 U3.15 | length 1426.3
  TOP w6: CY3.20@511.45,749.68 J1.20@531.65,786.07 ; CY3.20@512.21,765.53 CY3.20@531.65,741.39 ; CY3.20@512.3,752.23 J1.20@531.65,772.38 ; CY3.20@517.01,747.1 J1.20@531.65,786.07 ; CY3.20@517.32,748.4 J1.20@531.65,772.38 ; J1.20@517.44,768.94 CY3.20@531.65,741.39 ; CY3.20@519.44,727.64 565.54,707.5 ; CY3.20@522.21,733.06 565.54,707.5 ; CY3.20@522.82,745.39 J1.20@531.65,786.07 ; CY3.20@522.89,745.85 J1.20@531.65,772.38 ; J1.20@523.12,771.19 CY3.20@531.65,741.39 ; CY3.20@525.59,738.07 565.54,707.5 ; J1.20@531.65,788.13 531.65,744.44 CY3.20@531.65,741.39 ; CY3.20@538.2,749.73 565.54,707.5 ; CY3.20@539.92,745.69 J1.20@531.65,772.38 ; CY3.20@539.97,745.28 J1.20@531.65,786.07 ; J1.20@540.19,771.19 CY3.20@531.65,741.39 ; CY3.20@543.46,752.7 565.54,707.5 ; CY3.20@545.54,748.14 J1.20@531.65,772.38 ; CY3.20@545.8,746.92 J1.20@531.65,786.07 ; J1.20@545.86,768.94 CY3.20@531.65,741.39 ; CY3.20@549.08,755.04 565.54,707.5 ; CY3.20@550.63,751.87 J1.20@531.65,772.38 ; CY3.20@551.1,765.53 CY3.20@531.65,741.39 ; CY3.20@551.4,749.43 J1.20@531.65,786.07 ; U3.15@621.63,517.82 621.63,557.09 638.89,574.34 638.89,676.47 611.67,703.69 569.36,703.69 CY3.20@531.65,741.39 ; U3.15@621.63,528.05 621.63,551.56 ; CY3.20@531.39,744.44 565.54,707.5 ; CY3.20@531.39,744.44 J1.20@531.65,786.07 ; CY3.20@531.39,744.44 J1.20@531.65,772.38 ; CY3.20@531.65,741.39 J1.20@531.65,772.38
P05: CY3.19 J1.19 U3.14 | length 1402.6
  TOP w6: CY3.19@590.19,749.68 J1.19@610.39,786.07 ; CY3.19@590.41,767.28 CY3.19@610.39,730.76 ; CY3.19@591.04,752.23 J1.19@610.39,772.38 ; CY3.19@595.75,747.1 J1.19@610.39,786.07 ; J1.19@596,769.82 CY3.19@610.39,730.76 ; CY3.19@596.06,748.4 J1.19@610.39,772.38 ; CY3.19@598.21,735.97 633.77,698.56 ; CY3.19@601.56,745.39 J1.19@610.39,786.07 ; CY3.19@601.63,745.85 J1.19@610.39,772.38 ; J1.19@601.82,771.49 CY3.19@610.39,730.76 ; CY3.19@602.82,739.87 633.77,698.56 ; J1.19@610.39,788.13 610.39,744.44 610.39,721.94 650.89,681.44 650.89,569.37 641.32,559.8 U3.14@641.32,517.82 ; CY3.19@618.1,747.74 633.77,698.56 ; CY3.19@618.66,745.69 J1.19@610.39,772.38 ; CY3.19@618.71,745.28 J1.19@610.39,786.07 ; J1.19@618.97,771.49 CY3.19@610.39,730.76 ; CY3.19@623.95,749.23 633.77,698.56 ; CY3.19@624.28,748.14 J1.19@610.39,772.38 ; CY3.19@624.54,746.92 J1.19@610.39,786.07 ; J1.19@624.79,769.82 CY3.19@610.39,730.76 ; CY3.19@629.37,751.87 J1.19@610.39,772.38 ; CY3.19@629.98,750.03 633.77,698.56 ; CY3.19@630.14,749.43 J1.19@610.39,786.07 ; CY3.19@630.37,767.28 CY3.19@610.39,730.76 ; U3.14@641.32,528.05 641.32,551.56 ; CY3.19@610.13,744.44 J1.19@610.39,786.07 ; CY3.19@610.13,744.44 633.77,698.56 ; CY3.19@610.13,744.44 J1.19@610.39,772.38 ; CY3.19@610.39,730.76 J1.19@610.39,772.38
P06: CY3.18 J1.18 U3.13 | length 1291
  TOP w6: U3.13@661,517.82 661,552.54 662.89,554.43 662.89,688.6 689.13,714.84 ; U3.13@661,528.05 661,551.56 ; CY3.18@668.93,749.68 J1.18@689.13,786.07 ; CY3.18@669.15,767.28 CY3.18@689.13,730.76 ; CY3.18@669.61,737.09 689.13,714.84 ; CY3.18@669.78,752.23 J1.18@689.13,772.38 ; CY3.18@674.49,747.1 J1.18@689.13,786.07 ; CY3.18@674.74,740.71 689.13,714.84 ; J1.18@674.74,769.82 CY3.18@689.13,730.76 ; CY3.18@674.8,748.4 J1.18@689.13,772.38 ; CY3.18@680.3,745.39 J1.18@689.13,786.07 ; CY3.18@680.35,743.11 689.13,714.84 ; CY3.18@680.37,745.85 J1.18@689.13,772.38 ; J1.18@680.56,771.49 CY3.18@689.13,730.76 ; J1.18@689.13,788.13 689.13,744.44 689.13,714.84 ; CY3.18@697.4,745.69 J1.18@689.13,772.38 ; CY3.18@697.41,743.26 689.13,714.84 ; CY3.18@697.45,745.28 J1.18@689.13,786.07 ; J1.18@697.71,771.49 CY3.18@689.13,730.76 ; CY3.18@703.02,748.14 J1.18@689.13,772.38 ; CY3.18@703.07,740.96 689.13,714.84 ; CY3.18@703.28,746.92 J1.18@689.13,786.07 ; J1.18@703.53,769.82 CY3.18@689.13,730.76 ; CY3.18@708.11,751.87 J1.18@689.13,772.38 ; CY3.18@708.27,737.43 689.13,714.84 ; CY3.18@708.88,749.43 J1.18@689.13,786.07 ; CY3.18@709.11,767.28 CY3.18@689.13,730.76 ; CY3.18@688.87,744.44 J1.18@689.13,786.07 ; CY3.18@688.87,744.44 689.13,714.84 ; CY3.18@688.87,744.44 J1.18@689.13,772.38 ; CY3.18@689.13,730.76 J1.18@689.13,772.38
P07: CY3.17 J1.17 U3.12 | length 1463.5
  TOP w6: U3.12@680.69,517.82 680.69,674.96 706.96,701.24 748.41,701.24 ; U3.12@680.69,528.05 680.69,551.56 ; CY3.17@747.4,748.51 748.41,701.24 ; CY3.17@747.67,749.68 J1.17@767.87,786.07 ; CY3.17@747.89,767.28 CY3.17@767.87,730.76 ; CY3.17@748.52,752.23 J1.17@767.87,772.38 ; CY3.17@753.24,747.1 J1.17@767.87,786.07 ; CY3.17@753.49,748.24 748.41,701.24 ; J1.17@753.48,769.82 CY3.17@767.87,730.76 ; CY3.17@753.54,748.4 J1.17@767.87,772.38 ; CY3.17@759.04,745.39 J1.17@767.87,786.07 ; CY3.17@759.11,745.85 J1.17@767.87,772.38 ; J1.17@759.3,771.49 CY3.17@767.87,730.76 ; CY3.17@759.45,747.21 748.41,701.24 ; J1.17@767.87,788.13 767.87,744.44 767.87,720.7 748.41,701.24 ; CY3.17@775.14,740.24 748.41,701.24 ; CY3.17@776.14,745.69 J1.17@767.87,772.38 ; CY3.17@776.19,745.28 J1.17@767.87,786.07 ; J1.17@776.45,771.49 CY3.17@767.87,730.76 ; CY3.17@779.9,736.51 748.41,701.24 ; CY3.17@781.76,748.14 J1.17@767.87,772.38 ; CY3.17@782.02,746.92 J1.17@767.87,786.07 ; J1.17@782.27,769.82 CY3.17@767.87,730.76 ; CY3.17@784.18,732.16 748.41,701.24 ; CY3.17@786.85,751.87 J1.17@767.87,772.38 ; CY3.17@787.62,749.43 J1.17@767.87,786.07 ; CY3.17@787.85,767.28 CY3.17@767.87,730.76 ; 748.41,701.24 CY3.17@767.61,744.44 ; CY3.17@767.61,744.44 J1.17@767.87,786.07 ; CY3.17@767.61,744.44 J1.17@767.87,772.38 ; CY3.17@767.87,730.76 J1.17@767.87,772.38
P10: CY3.8 J1.8 U3.11 | length 1627.6
  TOP w6: U3.11@700.37,517.82 758.29,517.82 764.72,524.24 813.97,524.24 824.52,513.68 824.52,452.83 900,377.35 900,195 v1(886.06,181.34)
  BOTTOM w6: CY3.8@747.67,38.42 J1.8@767.87,2.03 ; CY3.8@747.67,48.89 767.87,85.28 ; CY3.8@747.89,21.59 CY3.8@767.87,58.1 ; CY3.8@753.24,41 J1.8@767.87,2.03 ; CY3.8@753.24,46.31 767.87,85.28 ; J1.8@753.48,19.05 CY3.8@767.87,58.1 ; CY3.8@759.04,42.71 J1.8@767.87,2.03 ; CY3.8@759.04,44.6 767.87,85.28 ; J1.8@759.3,17.37 CY3.8@767.87,58.1 ; J1.8@767.87,0.73 767.87,43.66 767.87,102.87 810,145 849.72,145 v1(886.06,181.34) ; J1.8@767.87,16.48 CY3.8@767.87,58.1 ; CY3.8@776.19,42.82 J1.8@767.87,2.03 ; CY3.8@776.19,44.49 767.87,85.28 ; J1.8@776.45,17.37 CY3.8@767.87,58.1 ; CY3.8@782.02,41.18 J1.8@767.87,2.03 ; CY3.8@782.02,46.13 767.87,85.28 ; J1.8@782.27,19.05 CY3.8@767.87,58.1 ; CY3.8@787.62,38.67 J1.8@767.87,2.03 ; CY3.8@787.62,48.64 767.87,85.28 ; CY3.8@787.85,21.59 CY3.8@767.87,58.1 ; J1.8@767.87,2.03 CY3.8@767.61,43.66 767.87,85.28